# Altium PCB PCB.PcbDoc
Units mm, origin at the board's own origin, x right, y up, seen from the top; angles counter-clockwise.
Board outline 39 x 39 mm, 2 copper layers (Top Layer, Bottom Layer); 10 components, 10 nets, 58 pads, 51 vias.
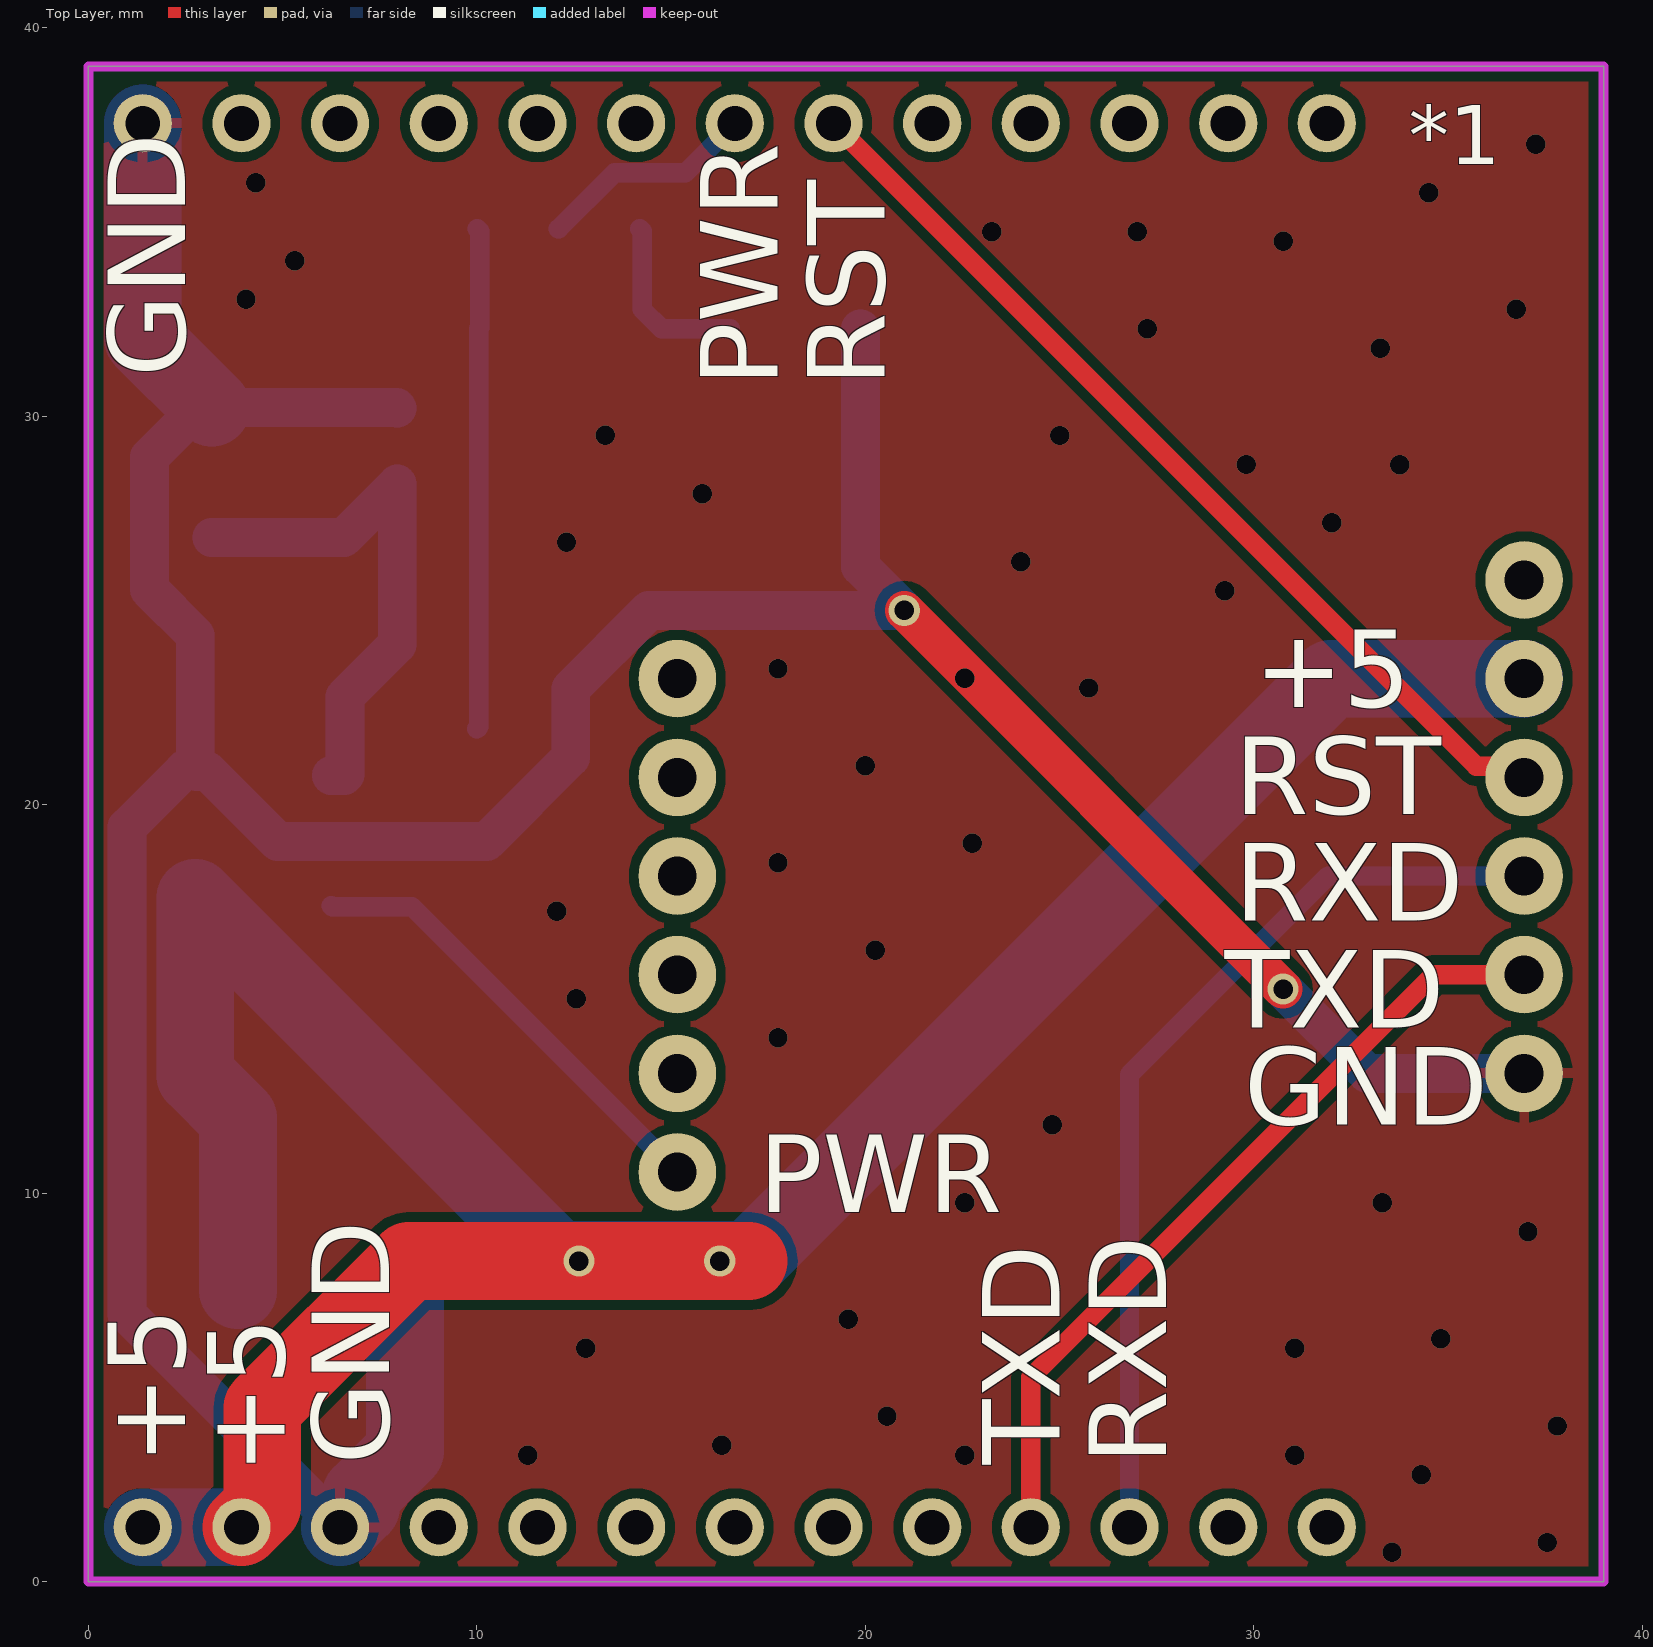
[diagram p0: Top Layer view]
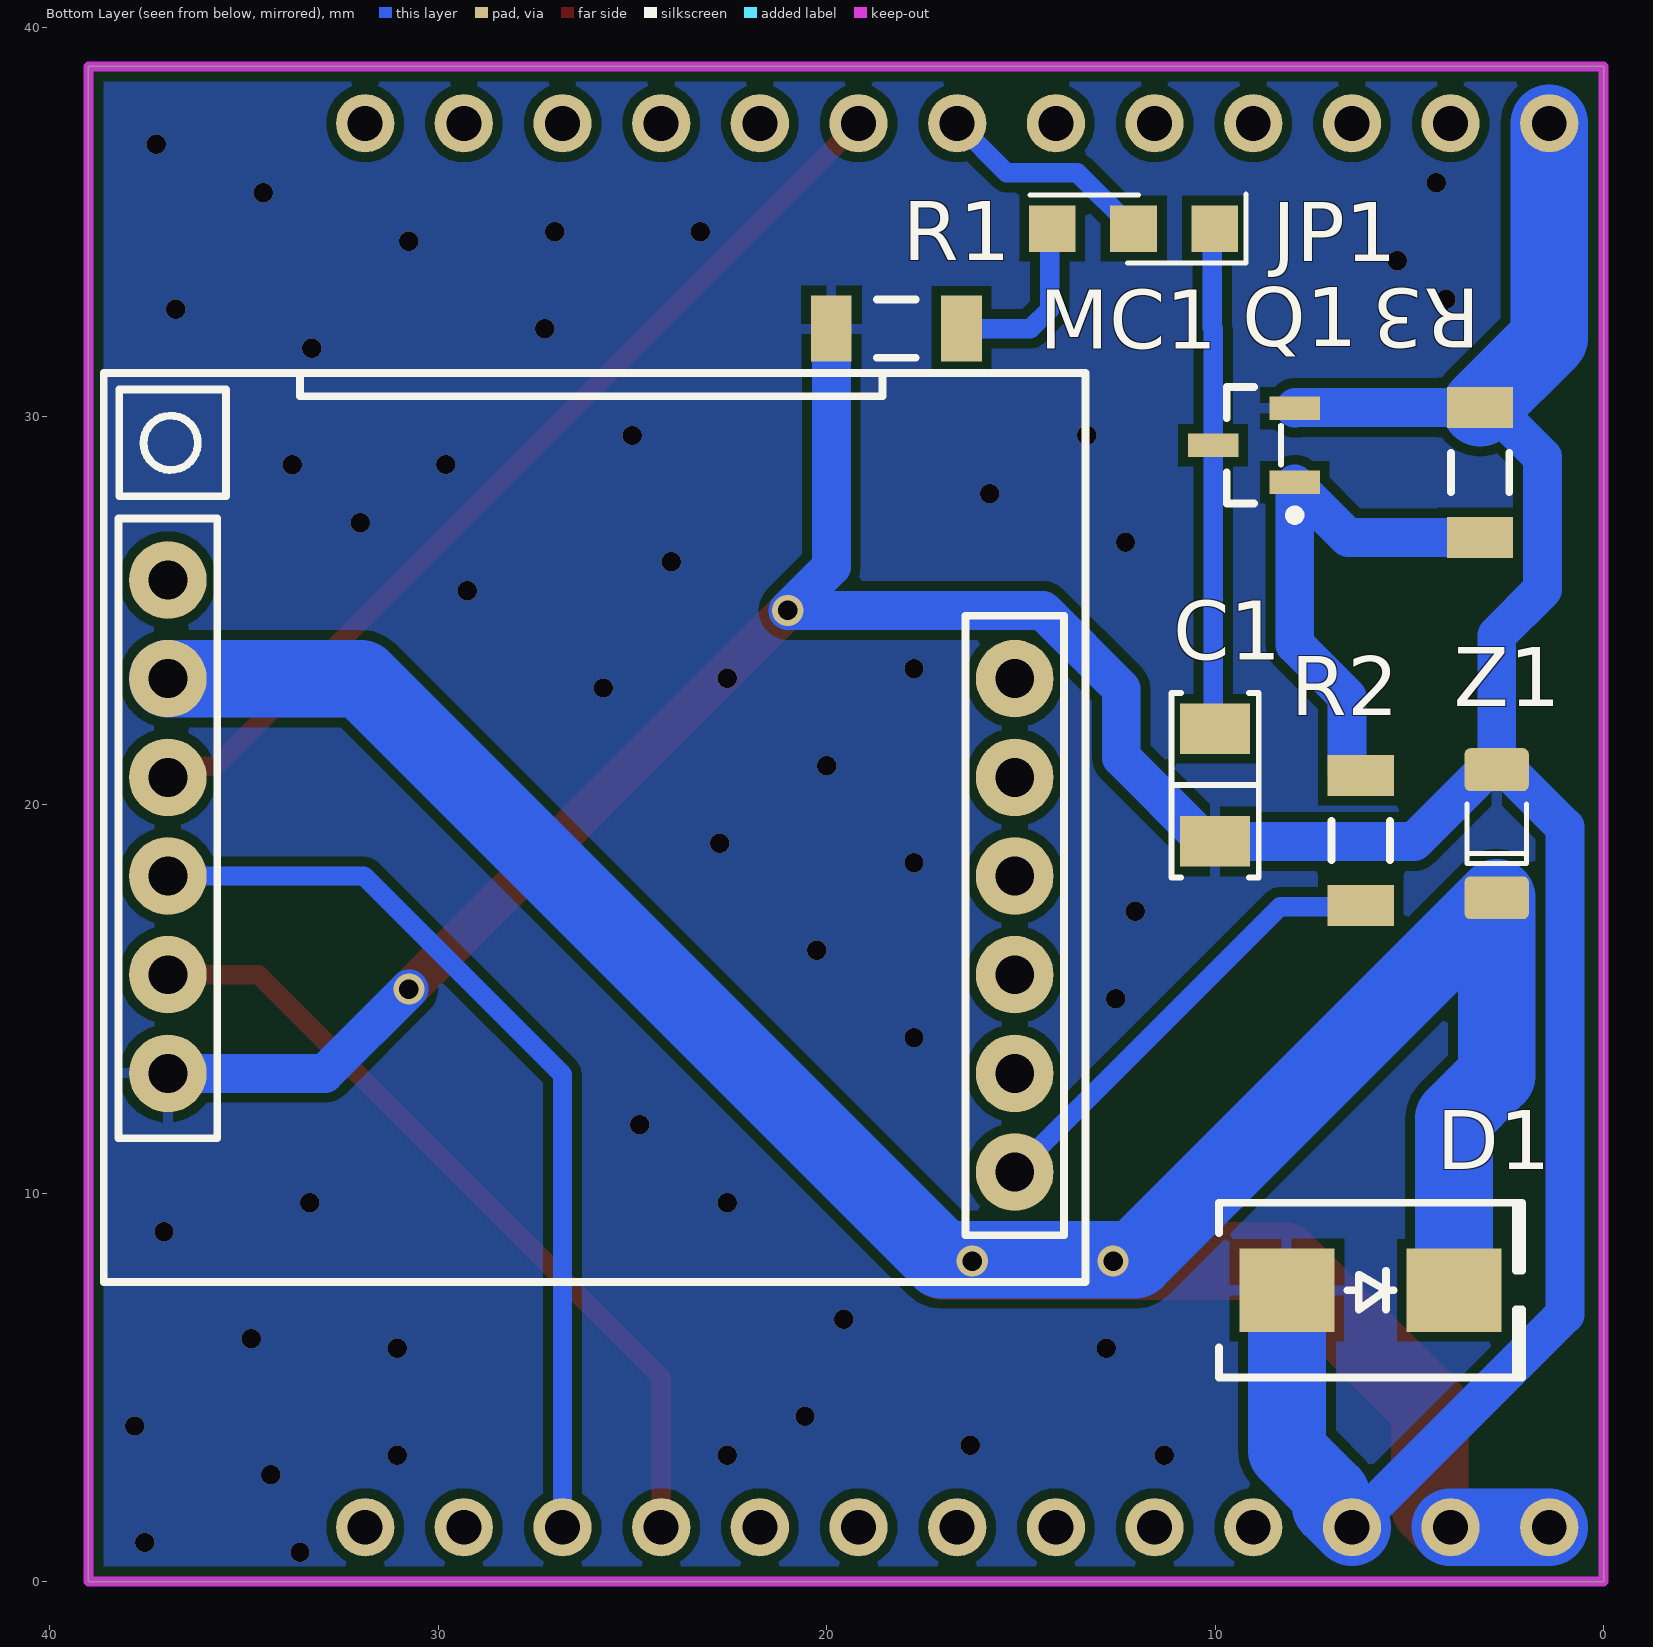
[diagram p1: Bottom Layer view, seen from below]
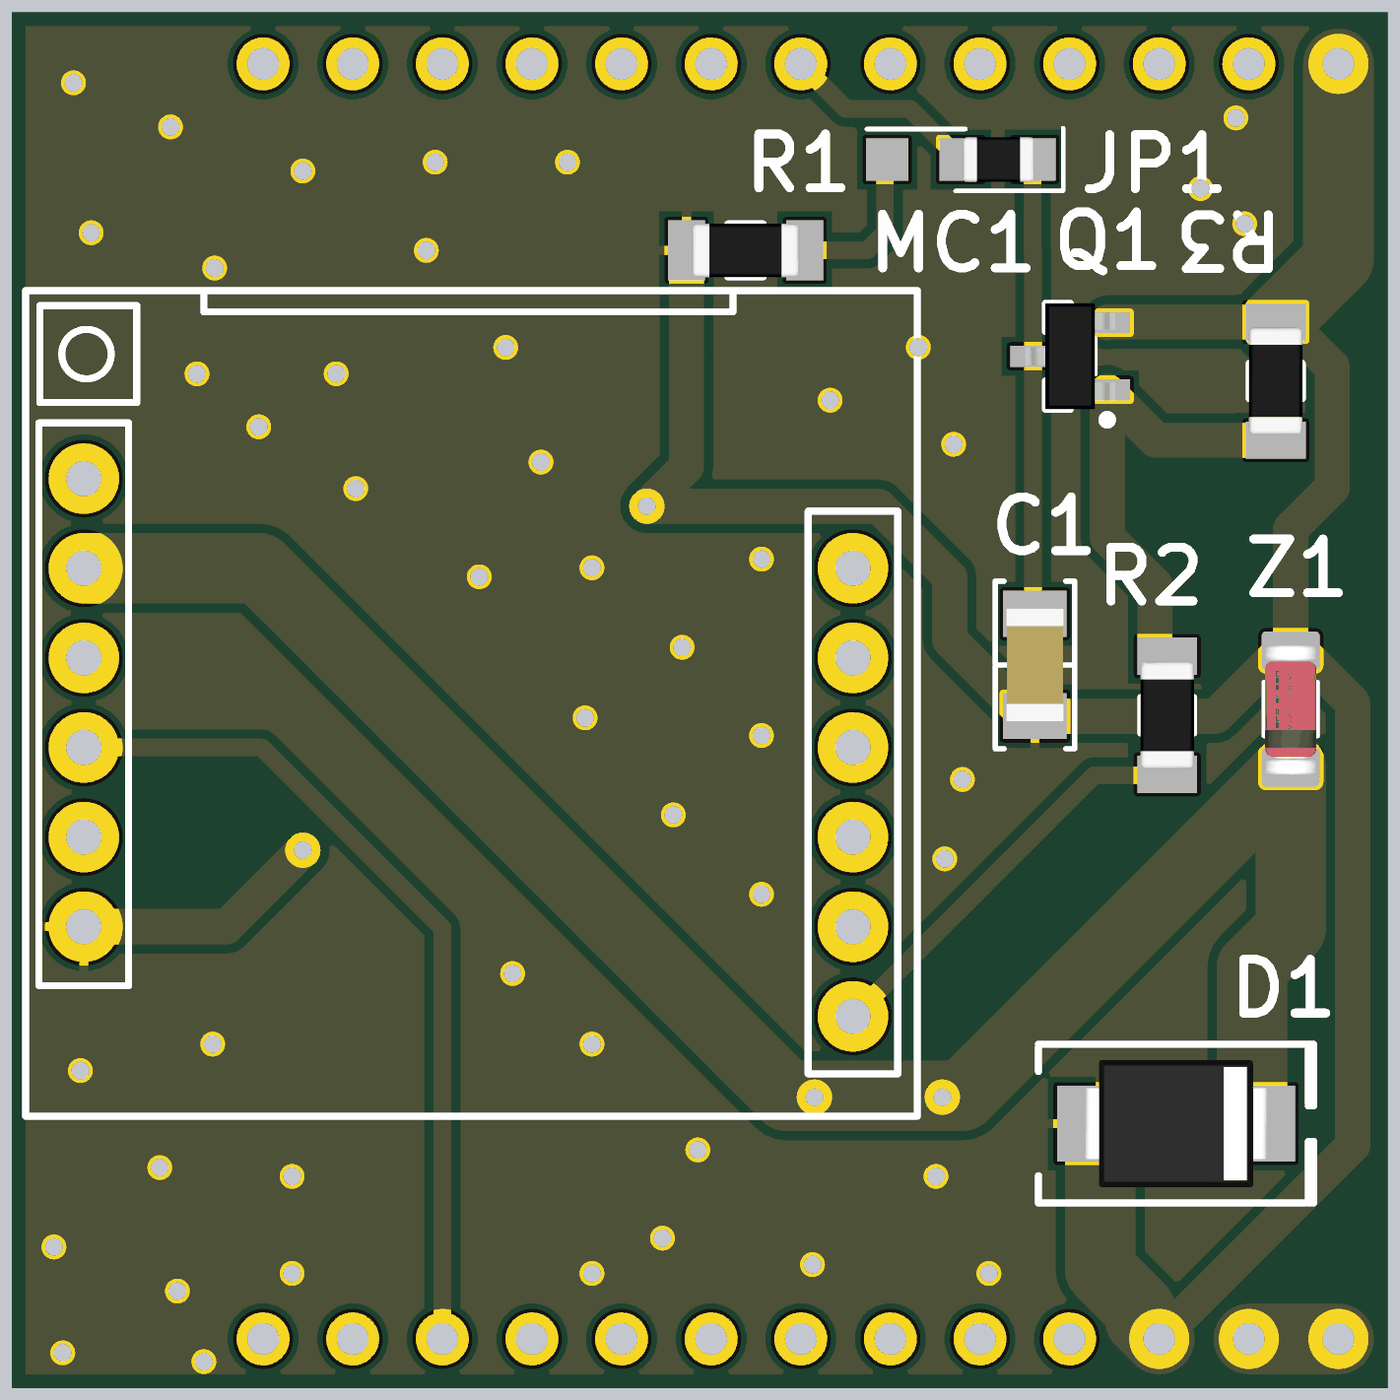
[diagram p2: 3D render of the assembled board from below, using the file's embedded part models]

## Layer stack, top to bottom
Top Solder: solder mask 0.0102, Solder Resist, Dk 3.5
Top Layer: signal copper 0.0356
Dielectric 1: dielectric 0.32, FR-4, Dk 4.8
Bottom Layer: signal copper 0.0356
Bottom Solder: solder mask 0.0102, Solder Resist, Dk 3.5

## Board outline
0,0 39,0 39,39 0,39

## Design rules (kind name [scope] priority, off if disabled: settings)
Clearance [All] p1: gap=0.254 ignorepadtopadclearanceinfootprint=FALSE except(0: Arc-Hole Track-Hole SMDPad-Hole THPad-Hole Via-Hole Fill-Hole Poly-Hole Region-Hole Text-Hole)
PolygonConnect [All] p1: connectstyle=Relief reliefconductorwidth=0.254 reliefentries=4 polygonreliefangle="90 Angle" airgapwidth=0.254
RoutingVias [All] p1: holewidth=0.711 width=1.27 viastyle="Through Hole" minholewidth=0.711 minwidth=1.27 maxholewidth=0.711 maxwidth=1.27
SilkToSolderMaskClearance [IsPad] p1: minsilkscreentomaskgap=0.075 clearancetoexposedcopper=TRUE
SolderMaskExpansion [All] p1: expansion=0.102 istentingtop=FALSE
Width [All] p1: maxlimit=2 minlimit=0.254 preferedwidth=0.5 minimp=50.000000 maximp=50.000000 favimp=50.000000
29 further rules are at their usual default settings.

## Components (designator, comment, footprint, x,y, rotation, side; value= is the part's Value field where it differs from the comment)
*1 "EC200miniDB" "EC200mini - NO3D" 1.397,1.397 r0 top
C1 "10n" "CAP 1206/3216" 10,20.5 r270 bottom
D1 "SMBJ15A" "DO214AA SMB" 6,7.5 r180 bottom
JP1 "0b" "Jumper Selector SMD" 12.25,34.75 r0 bottom
MC1 "Sim800L" "Sim800L_Module - NO3D" 26.057,18.161 r180 bottom
Q1 "NPN" SOT23_N 9,29.25 r0 bottom
R1 "1k" "RES 1206 (3216X08L)" 19.5,32.25 r180 bottom
R2 "4.7k" "RES 1206 (3216X08L)" 6.25,17.777 r90 bottom
R3 "47k" "RES 1206 (3216X08L)" 3.175,29.845 r270 bottom
Z1 "Value?" "SOD80, LL-34" 2.75,19.25 r90 bottom

## Footprints (in the part's own frame and the unit in brackets; to place one, negate y for a bottom-side part, rotate by r counter-clockwise, add the part's x,y. Pads: shape width x height; smd on the part's side, far side on the other; paste and mask are expansions set on the pad)
"CAP 1206/3216" [mm] "Chip Capacitor, 2-Leads, Body 3.25x1.60mm, IPC Medium Density"
  rect 1.3x1.8 smd: 1(-1.45,0) 2(1.45,0)
  silkscreen extent -2.37,-1.12 2.37,1.12, body extent -1.6,-0.81 1.6,0.81, height 1.62
"DO214AA SMB" [mm] "Molded Diode, 2-Leads, Body 4.31x3.62mm, IPC Medium Density"
  rect 2.45x2.15 smd: 1(-2.15,0) 2(2.15,0)
  silkscreen extent -3.9,-2.25 3.9,2.25, body extent -2.6,-1.8 2.6,1.8, height 2.4
"EC200mini - NO3D" [mm]
  round 1.5 hole 0.9: 1(0,0) 2(2.54,0) 3(5.08,0) 4(7.62,0) 5(10.16,0) 6(12.7,0) 7(15.24,0) 8(17.78,0) 9(20.32,0) 10(22.86,0) 11(25.4,0) 12(27.94,0) 13(30.48,0) 14(30.48,36.14) 15(27.94,36.14) 16(25.4,36.14) 17(22.86,36.14) 18(20.32,36.14) 19(17.78,36.14) 20(15.24,36.14) 21(12.7,36.14) 22(10.16,36.14) 23(7.62,36.14) 24(5.08,36.14) 25(2.54,36.14) 26(0,36.14)
"Jumper Selector SMD" [mm]
  rect 1.2x1.2 smd: 1(-2.244,-0.076) 2(-0.161,-0.076) 2(-0.144,-0.076) 3(1.939,-0.076)
  silkscreen extent -3.05,-0.97 2.51,0.81, body extent -2.24,-0.71 -0.2,0.56, height 0.6
"RES 1206 (3216X08L)" [mm] "Chip Resistor, 2-Leads, Body 3.2x1.6mm, IPC High Density _ (0.125 W)"
  rect 1.05x1.7 smd: 1(-0.377,0) 2(2.973,0)
  silkscreen extent 0.8,-0.75 1.8,0.75, body extent -0.23,-0.76 2.82,0.76, height 0.6
"Sim800L_Module - NO3D" [mm] "GSM/GPRS Module 25x23/6mm"
  round 2 hole 1: 1(-10.9,7.62) 2(-10.9,5.08) 3(-10.9,2.54) 4(-10.9,0) 5(-10.9,-2.54) 6(-10.9,-5.08) 7(10.9,-7.62) 8(10.9,-5.08) 9(10.9,-2.54) 10(10.9,0) 11(10.9,2.54) 12(10.9,5.08)
  silkscreen extent -12.55,-10.45 12.73,12.95
"SOD80, LL-34" [mm] "Diode, MiniMELF"
  round 0.5 on Mech15: 0(0,0)
  rrect25% 1.1x1.65 smd: 1(1.65,0) 2(-1.65,0)
  silkscreen extent -0.76,-0.76 0.76,0.76, body extent -1.88,-0.8 1.82,0.8, height 1.6
SOT23_N [mm] "SOT23, 3-Leads, Body 2.9x1.3mm, Pitch 0.95mm, Lead Span 2.3mm, IPC Medium Density"
  rect 1.3x0.6 smd: 1(-1.05,0.95) 2(-1.05,-0.95) 3(1.05,0)
  silkscreen extent -1.17,-1.5 0.7,1.92, body extent -1.27,-1.5 1.27,1.5, height 1.1

## Part data
*1: "EICUT.com"
C1: library part Cap_Multi_1u_50_1206, "Bipolar ceramic capacitor SMD", Package=Package?, Rating=Rating?, Inflow=5237, Type=Type?, Validation=Valid
D1: library part Semi_Diod_TVS_SMBJ15A, "Transil diodes provide high overvoltage protection by clamping action", Package=SMB, Rating=15V, Inflow=inflow?, Type=TVS, Validation=Valid
JP1: library part SW_Other_JSelector_SMD, "Jumper Selector", Package=0805, Rating=Rating?, Inflow=inflow?, Type=Selector, Validation=Valid
MC1: library part ModSen_Com_Sim800L, "SimCom GSM/GPRS Module", Package=Dip, Rating=Rating?, Inflow=5327, Type=GSM-GPRS, Validation=NT
Q1: library part Semi_BJT_BC817, "NPN General purpose Transistor", Package=Package?, Rating=Rating?, Inflow=inflow?, Type=Type?, Validation=Valid
R1 R2 R3: library part Res_SMD_1206, "Resistor", Package=1206, Rating=0.25W, Inflow=inflow?, Type=10%, Validation=Valid
Z1: library part Semi_Diod_Zener_SMD, "Zener Diode", Package=SOD-80, Rating=Rating?, Inflow=inflow?, Type=Zener, Validation=Valid

## Via types
v1: diameter 0.5, hole 0.5, Top Layer to Bottom Layer, 47 vias
v2: diameter 0.8, hole 0.5, Top Layer to Bottom Layer, 4 vias

## Nets (pads, with @x,y where several pads share a name; then routed paths per layer and width w, separated by ;. In a path a pad name is that pad's centre, name@x,y a point inside that pad or via, vN(x,y) a via of type N, cw(c..) or ccw(c..) an arc to the next point about the centre after c; other vN are vias at no path point)
+5: *1.1 *1.2 D1.2 MC1.2 Z1.2 | length 74.7
  Top Layer w2: *1.2 4.473,1.933 4.473,4.473 8.25,8.25 17,8.25
  Bottom Layer w2: *1.1 *1.2 ; D1.2 3.85,11.925 2.75,13.025 Z1.2 12.063,8.287 17.033,8.287 31.987,23.241 MC1.2
  other v2: 12.625,8.25 16.25,8.25
GND: *1.3 *1.26 C1.2 D1.1 MC1.6 Q1.2 R1.1 R3.1 Z1.1 | length 104.1
  Top Layer w1: v2(21,25) v2(30.75,15.25)
  Bottom Layer w1: *1.3 0.996,6.878 0.996,19.421 2.475,20.9 Z1.1 ; Q1.2 7.928,30.222 R3.1 2.85,30.222 1.571,28.943 1.571,25.536 2.75,24.357 Z1.1 ; R1.1 19.877,26.123 v2(21,25) 20.995,24.995 14.43,24.995 12.415,22.98 12.415,21.215 10.25,19.05 C1.2 4.875,19.05 3.075,20.85 2.8,20.85 Z1.1 ; v2(30.75,15.25) 32.919,13.081 MC1.6
  Bottom Layer w2: *1.26 1.397,32 R3.1 ; *1.3 7.013,1.933 7.013,2.227 8.15,3.364 D1.1
  other v1: 33.555,0.754 37.555,1.004 34.305,2.754 11.305,3.254 22.555,3.254 31.055,3.254 16.305,3.504 37.805,4.004 20.555,4.254 12.805,6.004 31.055,6.004 34.805,6.254 19.555,6.754 37.055,9.004 22.555,9.754 33.305,9.754 24.805,11.754 17.75,14 12.555,15.004 20.25,16.25 12.055,17.254 17.75,18.5 22.75,19 20,21 25.75,23 22.555,23.254 17.75,23.5 29.25,25.5 24,26.25 12.305,26.754 32,27.25 15.805,28.004 29.805,28.754 33.75,28.75 25,29.5 13.305,29.504 33.25,31.75 27.25,32.25 36.75,32.75 4.055,33.004 5.305,34.004 30.75,34.5 23.25,34.75 27,34.75 34.5,35.75 4.305,36.004 37.25,37
Net*1_20: *1.20 JP1.2 | length 5.7
  Bottom Layer w0.5: JP1.2@12.089,34.826 12.106,34.826 13.541,36.261 15.361,36.261 *1.20
NetJP1_3: JP1.3 R1.2 | length 4.6
  Bottom Layer w0.5: JP1.3 14.251,34.764 14.251,32.749 14.75,32.25 R1.2
NetMC1_7: MC1.7 R2.1 | length 11.7
  Bottom Layer w0.5: R2.1 6.275,17.375 8.323,17.375 MC1.7
NetQ1_1: Q1.1 R2.2 R3.2 | length 13.7
  Bottom Layer w1: R3.2 6.572,26.872 7.95,28.25 7.95,24.125 6.6,22.775 6.6,20.775 6.575,20.75 R2.2
PWR: C1.1 JP1.1 Q1.3 | length 12.9
  Bottom Layer w0.5: C1.1 10.05,22 Q1.3 10.05,32.25 10.068,32.268 10.068,34.764 JP1.1
RST: *1.19 MC1.3 | length 24.8
  Top Layer w0.5: *1.19 35.726,20.988 36.67,20.988 MC1.3
RXD: *1.11 MC1.4 | length 23.9
  Bottom Layer w0.5: *1.11 26.797,13.047 31.911,18.161 MC1.4
TXD: *1.10 MC1.5 | length 20.9
  Top Layer w0.5: *1.10 24.257,5.257 34.621,15.621 MC1.5
pads on no net: *1.4 *1.5 *1.6 *1.7 *1.8 *1.9 *1.12 *1.13 *1.14 *1.15 *1.16 *1.17 *1.18 *1.21 *1.22 *1.23 *1.24 *1.25 MC1.1 MC1.8 MC1.9 MC1.10 MC1.11 MC1.12 Z1.0

## Polygon pours and split planes (outlines as drawn)
GND on Top Layer "GND_L01_P000" (solid, remove dead copper, pour order 0): 39,39 39,0 0,0 0,39
GND on Bottom Layer "GND_L02_P001" (solid, remove dead copper, pour order 1): 0,39 39,39 39,0 0,0

## Keep-outs
Keep-Out Layer:
  the board outline again, w0.254

## Silkscreen, mask and mechanical layers (free items; w line width, h text height)
Top Overlay:
  text "GND" at 2.496,31.004 h2 r90
  text "PWR" at 17.746,30.754 h2 r90
  text "RST" at 20.496,30.754 h2 r90
  text "+5" at 30.004,22.504 h2
  text "RST" at 29.504,19.754 h2
  text "RXD" at 29.504,17.004 h2
  text "TXD" at 29.254,14.254 h2
  text "GND" at 29.754,11.754 h2
  text "PWR" at 17.254,9.504 h2
  text "+5" at 2.496,3.004 h2 r90
  text "GND" at 7.746,3.004 h2 r90
  text "TXD" at 24.996,3.004 h2 r90
  text "RXD" at 27.746,3.004 h2 r90
  text "+5" at 5.054,2.762 h2 r90